# EAGLE board stl_mainboard (EAGLE 7.7.0)
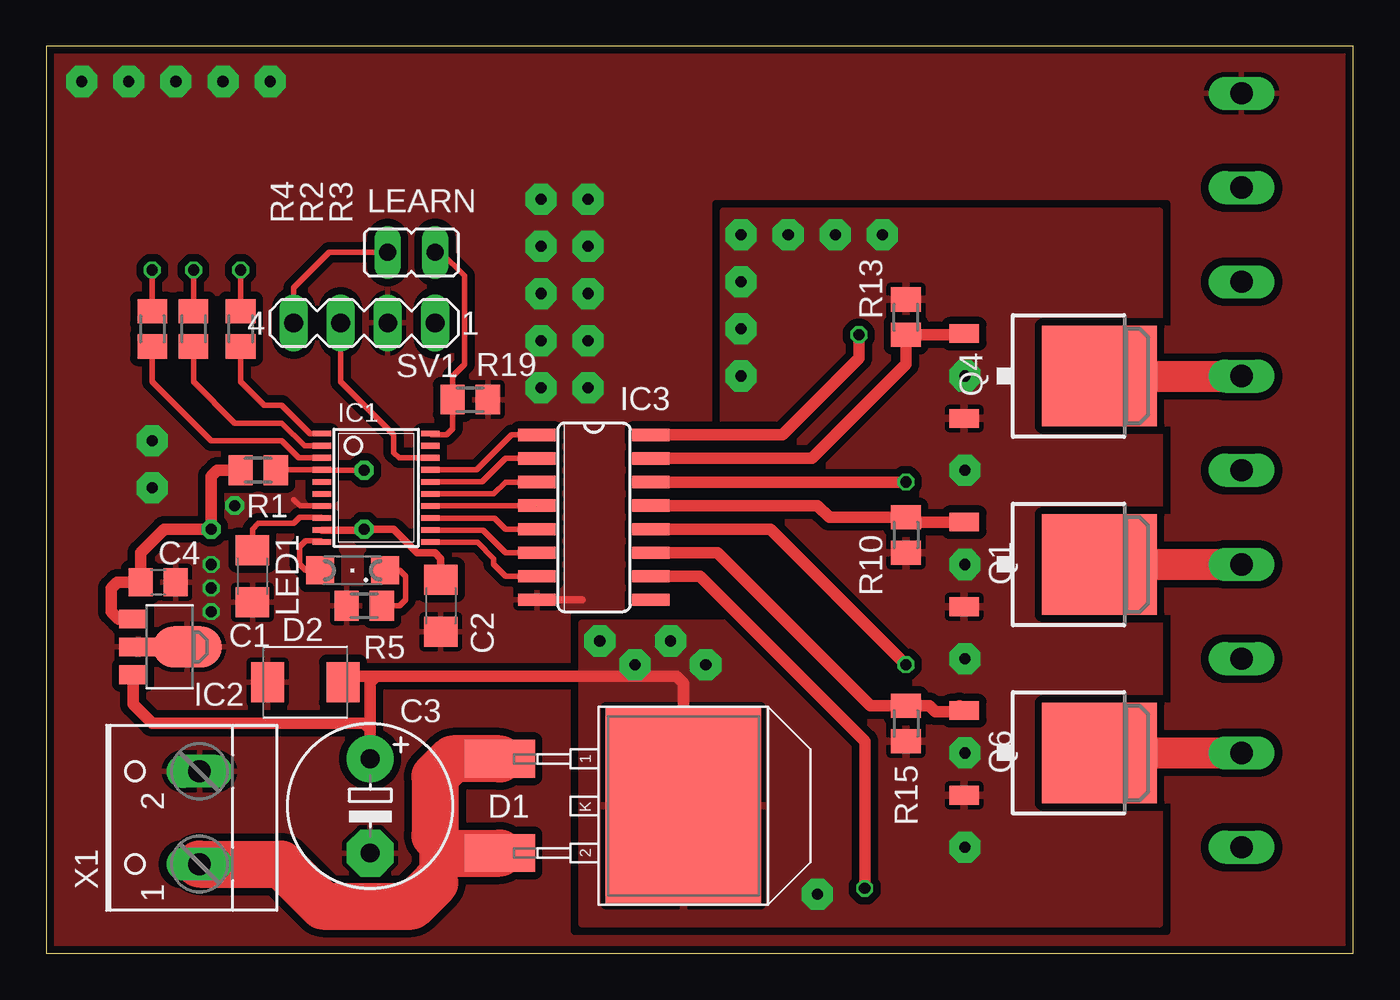
[diagram p0: board, top side]
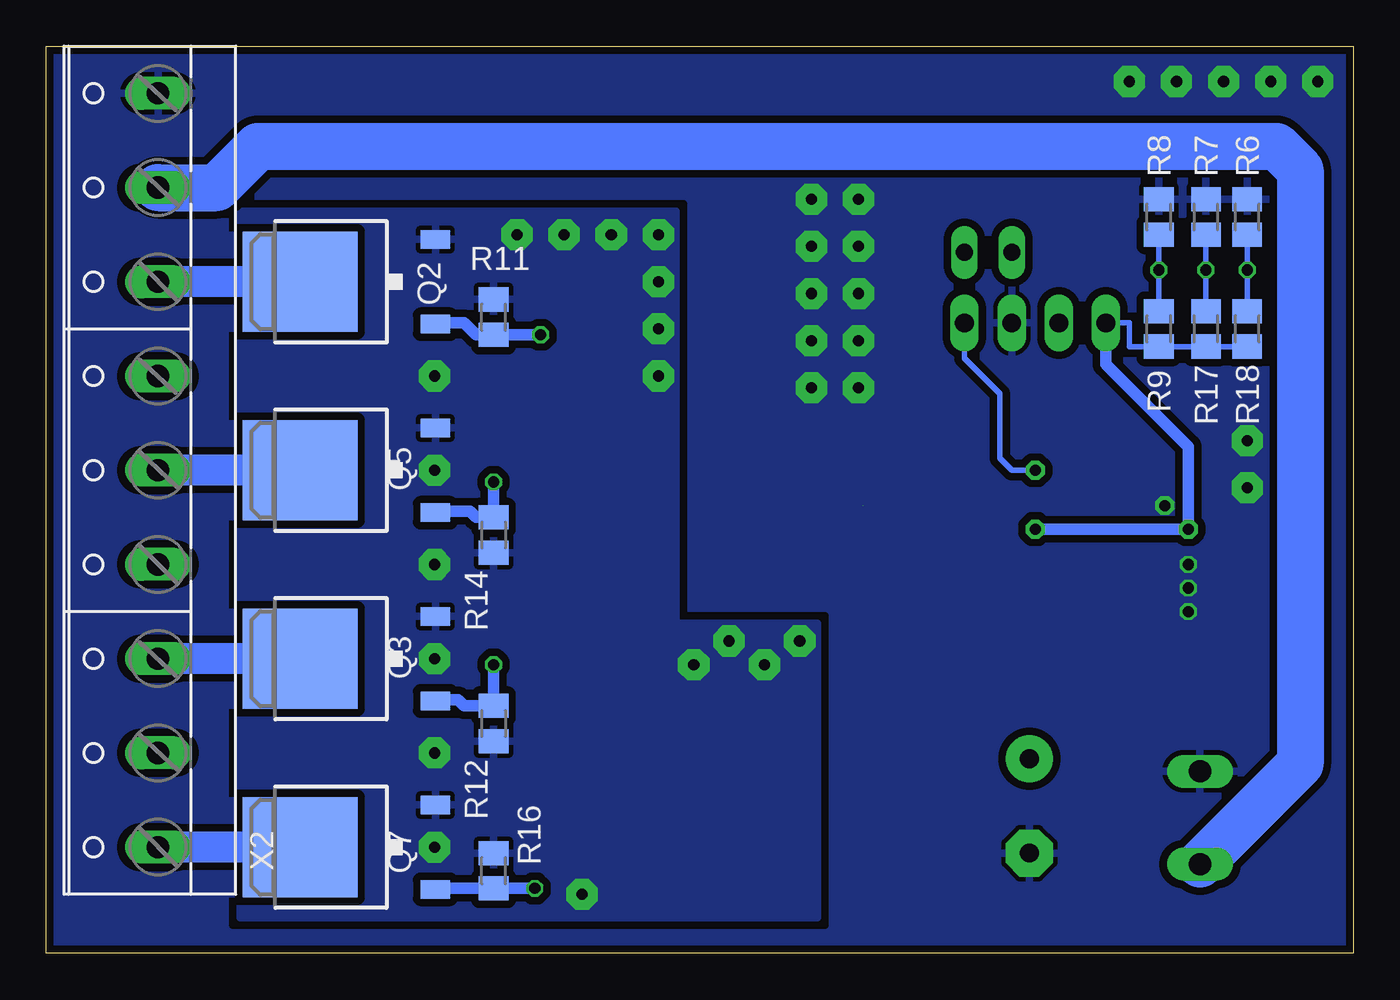
[diagram p1: board, bottom side, seen from below]

Size 70.47 x 48.88 mm. Coordinates in mm from the lower left corner, seen from the top.
Outline: 0,0 70.47,0 70.47,48.88 0,48.88 0,0
Copper layers (1*16): Top 0.035mm / dielectric 1.5mm / Bottom 0.035mm
Design rules "dirt_cheap_dirty_boards.v1": minimum track width 5mil, minimum drill 12mil, track to track 5mil, track to pad 5mil, pad to pad 5mil, via to via 5mil, smd to smd 0mil, copper to edge 10mil, drill to drill 10mil, minimum pad ring 10mil, minimum via ring 6mil, stop-mask expansion 2mil, vias tented up to drill 25mil, thermal gap 10mil

## Footprints (pad centres in the part's own frame; a part is rotated, then mirrored left to right if it is on the bottom)
C1206 = smd 1.6 x 1.8: 1 -1.4,0; 2 1.4,0
E5-8,5 = drill 1.016 pad 2.54: + -2.54,0 | drill 1.016 pad 2.54 octagon: - 2.54,0
C0805 = smd 1.3 x 1.5: 1 -0.95,0; 2 0.95,0
TO263AB = smd 2.032 x 3.81: 1 -2.54,0; 2 2.54,0 | smd 10.668 x 8.382: K 0,9.906
SMBJ = smd 1.78 x 2.16: A 2.04,0; C -2.03,0
TSSOP20 = smd 0.305 x 0.991: 1 -2.925,-2.918; 2 -2.275,-2.918; 3 -1.625,-2.918; 4 -0.975,-2.918; 5 -0.325,-2.918; 6 0.325,-2.918; 7 0.975,-2.918; 8 1.625,-2.918; 9 2.275,-2.918; 10 2.925,-2.918; 11 2.925,2.918; 12 2.275,2.918; 13 1.625,2.918; 14 0.975,2.918; 15 0.325,2.918; 16 -0.325,2.918; 17 -0.975,2.918; 18 -1.625,2.918; 19 -2.275,2.918; 20 -2.925,2.918
SOT89 = smd 1 x 1.5: 1 -1.499,-1.981; 3 1.499,-1.981 | smd 1 x 2: 2 0,-1.727 | smd 2.2 x 3.7: 2@1 0,0.94
SO16 = smd 0.66 x 2.032: 1 -4.445,-3.073; 2 -3.175,-3.073; 3 -1.905,-3.073; 4 -0.635,-3.073; 5 0.635,-3.073; 6 1.905,-3.073; 7 3.175,-3.073; 8 4.445,-3.073; 9 4.445,3.073; 10 3.175,3.073; 11 1.905,3.073; 12 0.635,3.073; 13 -0.635,3.073; 14 -1.905,3.073; 15 -3.175,3.073; 16 -4.445,3.073
JP1 = drill 0.914 long: 1 0,-1.27; 2 0,1.27
SML1206 = smd 1.5 x 1.5: A 1.75,0; C -1.75,0
TO252 = smd 1 x 1.6: 1 -2.28,-4.8; 2 2.28,-4.8 | smd 5.4 x 6.2: 3 0,2.5
M0805 = smd 1.3 x 1.6: 1 -0.95,0; 2 0.95,0
MA04-1 = drill 1.016 long: 1 -3.81,0; 2 -1.27,0; 3 1.27,0; 4 3.81,0
W237-102 = drill 1.194 long: 1 -2.5,-1.27; 2 2.5,-1.27
W237-9P = drill 1.194 long: 1 -20.32,-0.635; 2 -15.24,-0.635; 3 -10.16,-0.635; 4 -5.08,-0.635; 5 0,-0.635; 6 5.08,-0.635; 7 10.16,-0.635; 8 15.24,-0.635; 9 20.32,-0.635

## Placement (x,y rotation side)
C1  1uF  [C1206]  11.11,20.32 270 top
C2  100nf  [C1206]  21.27,18.73 270 top
C3  0.33  [E5-8,5]  17.46,7.94 270 top
C4  0.1  [C0805]  6.03,20 0 top
D1  48CTQ060  [TO263AB]  24.45,7.94 270 top
D2  SMBJ15  [SMBJ]  13.97,14.61 180 top
IC1  STM8S003F3  [TSSOP20]  17.78,25.08 270 top
IC2  78L05F  [SOT89]  6.67,16.51 270 top
IC3  ULN2001AD  [SO16]  29.53,23.5 270 top
LEARN  [JP1]  19.68,37.78 90 top
LED1  [SML1206]  16.51,20.64 180 top
Q1  AUIRFR5305  [TO252]  54.29,20.95 270 top
Q2  AUIRFR5305  [TO252]  54.29,36.2 90 bottom
Q3  AUIRFR5305  [TO252]  54.29,15.88 90 bottom
Q4  AUIRFR5305  [TO252]  54.29,31.11 270 top
Q5  AUIRFR5305  [TO252]  54.29,26.04 90 bottom
Q6  AUIRFR5305  [TO252]  54.29,10.79 270 top
Q7  AUIRFR5305  [TO252]  54.29,5.71 90 bottom
R1  1K  [M0805]  11.43,26.04 0 top
R2  1K  [M0805]  7.94,33.66 90 top
R3  1K  [M0805]  10.48,33.66 90 top
R4  1K  [M0805]  5.71,33.66 90 top
R5  5k6  [M0805]  17.14,18.73 180 top
R6  0  [M0805]  5.71,39.69 270 bottom
R7  0  [M0805]  7.94,39.69 270 bottom
R8  0  [M0805]  10.48,39.69 270 bottom
R9  0  [M0805]  10.48,33.66 270 bottom
R10  1K  [M0805]  46.35,22.54 90 top
R11  1K  [M0805]  46.35,34.29 270 bottom
R12  1K  [M0805]  46.35,12.38 90 bottom
R13  1K  [M0805]  46.35,34.29 270 top
R14  1K  [M0805]  46.35,22.54 90 bottom
R15  1K  [M0805]  46.35,12.38 90 top
R16  1K  [M0805]  46.35,4.45 270 bottom
R17  0  [M0805]  7.94,33.66 270 bottom
R18  0  [M0805]  5.71,33.66 270 bottom
R19  1K  [M0805]  22.86,29.84 180 top
SV1  [MA04-1]  17.14,33.97 180 top
X1  [W237-102]  6.99,7.3 90 top
X2  [W237-9P]  65.09,26.04 90 bottom

## Library data of the parts
C1-C4 R1-R19 = rcl
D1 = 48ctq060
D2 = diode
IC1 = stm8
IC2 = linear
IC3 = uln-udn
LEARN = jumper
LED1 = led
Q1-Q7 = transistor-fet
SV1 = con-lstb; OC_FARNELL: unknown; OC_NEWARK: unknown
X1 = con-wago-500; MPN: 237-102; OC_FARNELL: unknown; OC_NEWARK: 70K9898
X2 = con-wago-508; OC_FARNELL: unknown; OC_NEWARK: unknown

## Nets
+5V: C2.1 C4.1 IC1.9 IC2.1 LEARN.2 R1.1 R9.2 R17.2 R18.2 SV1.4
B+: D1.1 D1.2 X1.1 X2.8
BULB01: Q2.3 X2.7
BULB01_CTRL: IC3.16 Q2.1 R11.2
BULB02: Q4.3 X2.6
BULB02_CTRL: IC3.15 Q4.1 R13.2
BULB03: Q5.3 X2.5
BULB03_CTRL: IC3.14 Q5.1 R14.2
BULB04: Q1.3 X2.4
BULB04_CTRL: IC3.13 Q1.1 R10.2
BULB05: Q3.3 X2.3
BULB05_CTRL: IC3.12 Q3.1 R12.2
BULB06: Q6.3 X2.2
BULB06_CTRL: IC3.11 Q6.1 R15.2
BULB07: Q7.3 X2.1
BULB07_CTRL: IC3.10 Q7.1 R16.2
GND: C1.2 C2.2 C3.- C4.2 D2.A IC1.7 IC2.2 IC2.2@1 IC3.8 R5.2 R6.1 R7.1 R8.1 R19.1 SV1.2 X1.2 X2.9
LEARN: IC1.20 LEARN.1 R19.2
N$1: IC1.10 LED1.A
N$2: LED1.C R5.1
N$3: C1.1 IC1.8
N$5: IC1.1 R3.1
N$6: IC1.2 R2.1
N$7: IC1.3 R4.1
N$8: R3.2 R8.2 R9.1
N$9: R2.2 R7.2 R17.1
N$10: R4.2 R6.2 R18.1
NRST: IC1.4 R1.2 SV1.1
Q01: IC1.17 IC3.1
Q02: IC1.16 IC3.2
Q03: IC1.15 IC3.3
Q04: IC1.14 IC3.4
Q05: IC1.13 IC3.5
Q06: IC1.12 IC3.6
Q07: IC1.11 IC3.7
SWIM: IC1.18 SV1.3
VDD: C3.+ D1.K D2.C IC2.3 Q1.2 Q2.2 Q3.2 Q4.2 Q5.2 Q6.2 Q7.2 R10.1 R11.1 R12.1 R13.1 R14.1 R15.1 R16.1

## Tracks (layer width: path | path; a pad name or v marks a point on that pad's centre or on a via)
+5V  (via drill 0.6 pad 1.02)
  Top 0.305: LEARN.2 15.24,37.78 13.34,35.88 SV1.4
  Top 0.406: IC1.9 17.09,22.81 v17.14,22.86 18.73,22.86 20,21.59 20.95,21.59 21.27,21.27 C2.1
  Top 0.61: IC2.1 3.9,18.01 3.49,18.41 3.49,19.68 3.81,20 C4.1 5.08,21.59 6.35,22.86 v8.89,22.86 8.89,25.72 9.21,26.04 R1.1
  Bottom 0.305: R18.2 R17.2 R9.2 12.06,32.7 12.06,33.97 SV1.4
  Bottom 0.61: v17.14,22.86 v8.89,22.86 8.89,27.3 13.34,31.75 SV1.4
B+
  Top 1.676: 21.91,5.4 20.95,6.35 20.95,3.81
  Top 2.54: D1.1 21.91,10.48 20.95,9.53 20.95,6.35 | 21.91,5.4 D1.2 | X1.1 12.66,4.8 14.92,2.54 19.68,2.54 20.95,3.81
  Bottom 2.54: X1.1 2.86,10.2 2.86,42.23 4.13,43.5 59.05,43.5 61.28,41.27 X2.8
BULB01
  Bottom 1.676: Q2.3 X2.7
BULB01_CTRL  (via drill 0.6 pad 0.81)
  Top 0.61: IC3.16 39.69,27.94 43.81,32.07 v43.81,33.34
  Bottom 0.61: v43.81,33.34 R11.2 47.31,33.34 47.94,33.97 49.44,33.97 Q2.1
BULB02
  Top 1.676: Q4.3 X2.6
BULB02_CTRL
  Top 0.61: IC3.15 41.27,26.67 46.35,31.75 R13.2 49.44,33.34 Q4.1
BULB03
  Bottom 1.676: Q5.3 X2.5
BULB03_CTRL  (via drill 0.6 pad 0.81)
  Top 0.61: IC3.14 v46.35,25.4
  Bottom 0.61: v46.35,25.4 R14.2 47.3,23.49 47.62,23.81 49.44,23.81 Q5.1
BULB04
  Top 1.676: Q1.3 X2.4
BULB04_CTRL
  Top 0.61: IC3.13 41.59,24.13 42.23,23.5 R10.2 46.61,23.23 Q1.1
BULB05
  Bottom 1.676: Q3.3 X2.3
BULB05_CTRL  (via drill 0.6 pad 0.81)
  Top 0.61: IC3.12 39.05,22.86 v46.35,15.56
  Bottom 0.61: v46.35,15.56 R12.2 47.94,13.33 48.26,13.65 49.44,13.65 Q3.1
BULB06
  Top 1.676: Q6.3 X2.2
BULB06_CTRL
  Top 0.61: 49.23,13.34 Q6.1 49.44,13.02 47.94,13.02 47.63,13.33 R15.2 44.45,13.34 36.2,21.59 IC3.11
BULB07
  Bottom 1.676: Q7.3 X2.1
BULB07_CTRL  (via drill 0.6 pad 0.81)
  Top 0.61: IC3.10 35.24,20.32 44.13,11.43 v44.13,3.49
  Bottom 0.61: v44.13,3.49 R16.2 49.43,3.5 Q7.1
GND  (via drill 0.6 pad 0.81, 0.6 pad 1.02, 0.6 pad 1.68)
  Top 0.305: IC1.7 13.68,24.11 13.34,24.45
  Top 0.406: IC3.8 28.89,19.05
  other vias: 10.16,24.13 8.89,20.95 8.89,19.68 8.89,18.41 1.91,46.99 4.45,46.99 6.99,46.99 9.53,46.99 12.06,46.99 26.67,40.64 29.21,40.64 26.67,38.1 29.21,38.1 26.67,35.56 29.21,35.56 26.67,33.02 29.21,33.02 26.67,30.48 29.21,30.48 5.71,27.62 5.71,25.08
  pour Top (isolate 0.406, rank 2): 0,48.9 70.48,48.9 70.48,0 0,0
  pour Bottom (isolate 0.406, rank 2): 0,48.9 70.48,48.9 70.48,0 0,0
LEARN
  Top 0.305: LEARN.1 21.27,37.78 22.54,36.51 22.54,31.75 21.91,31.11 R19.2 21.91,28.26 21.59,27.94 20.77,27.94 IC1.20
N$1
  Top 0.305: LED1.A 13.97,20.64 13.65,20.95 13.65,21.91 13.97,22.23 14.79,22.23 IC1.10
N$2
  Top 0.305: LED1.C 19.05,20.64 19.37,20.32 19.37,19.05 19.05,18.73 R5.1
N$3
  Top 0.305: C1.1 11.11,22.86 11.43,23.18 13.34,23.18 13.65,23.5 14.82,23.5 IC1.8
N$5
  Top 0.305: IC1.1 14.22,28.01 12.7,29.53 11.75,29.53 10.48,30.8 R3.1
N$6
  Top 0.305: IC1.2 13.92,27.36 12.7,28.57 10.16,28.57 7.94,30.8 R2.1
N$7
  Top 0.305: IC1.3 13.62,26.71 12.7,27.62 8.89,27.62 5.71,30.8 R4.1
N$8  (via drill 0.6 pad 0.81)
  Top 0.305: R3.2 v10.48,36.83
  Bottom 0.305: R8.2 v10.48,36.83 R3.2
N$9  (via drill 0.6 pad 0.81)
  Top 0.305: R17.1 v7.94,36.83
  Bottom 0.305: R7.2 v7.94,36.83 R17.1
N$10  (via drill 0.6 pad 0.81)
  Top 0.305: R18.1 v5.71,36.83
  Bottom 0.305: R6.2 v5.71,36.83 R18.1
NRST  (via drill 0.6 pad 1.02)
  Top 0.305: v17.14,26.04 14.88,26.04 IC1.4 12.4,26.06 R1.2
  Bottom 0.305: v17.14,26.04 18.41,26.04 19.05,26.67 19.05,30.16 20.95,32.07 SV1.1
Q01
  Top 0.305: IC1.17 23.2,26.06 25.08,27.94 IC3.1
Q02
  Top 0.305: IC1.16 23.5,25.41 24.77,26.67 IC3.2
Q03
  Top 0.305: IC1.15 24.12,24.76 24.77,25.4 IC3.3
Q04  (1 unrouted)
  Top 0.305: IC3.4 | IC1.14 26.43,24.11
Q05
  Top 0.305: IC1.13 24.17,23.46 24.77,22.86 IC3.5
Q06
  Top 0.305: IC1.12 23.55,22.81 24.77,21.59 IC3.6
Q07
  Top 0.305: IC1.11 23.25,22.16 24.13,21.27 24.13,20.95 24.77,20.32 IC3.7
SWIM
  Top 0.305: IC1.18 19.01,26.71 18.73,26.99 18.73,27.94 15.88,30.8 SV1.3
VDD  (via drill 0.6 pad 1.68)
  Top 0.61: D1.K 34.35,14.54 33.97,14.92 17.78,14.92 | 17.78,14.92 16.32,14.92 D2.C | C3.+ 17.46,12.06 | 17.46,12.06 17.46,14.61 17.78,14.92 | IC2.3 4.69,13.41 5.71,12.38 17.14,12.38 17.46,12.06
  other vias: 37.47,38.73 40.01,38.73 42.55,38.73 45.09,38.73 49.53,10.79 49.53,26.04 49.53,15.88 37.47,36.2 37.47,33.66 37.47,31.11 49.53,5.71 49.53,20.95 49.53,31.11 35.56,15.56 41.59,3.17 33.66,16.83 31.75,15.56 29.84,16.83
  pour Top (isolate 0.406): 36.51,40.01 60.01,40.01 60.01,1.59 28.89,1.59 28.89,17.78 36.51,17.78
  pour Bottom (isolate 0.406): 36.51,40.01 60.01,40.01 60.01,1.91 28.89,1.91 28.89,17.78 36.51,17.78